# Altium PCB Mother_Board_New - 4 Layers - Fixed.PcbDoc (part 2 of 2)
Units mil, origin at the board's own origin, x right, y up, seen from the top; angles counter-clockwise.
Board outline 4940 x 2025 mil, 3 copper layers (Layer 1, Layer 2, Layer 3), stack 76.411 mil thick; 104 components, 89 nets, 362 pads, 31 vias.
Unrouted connection lines stored in the file: 65.
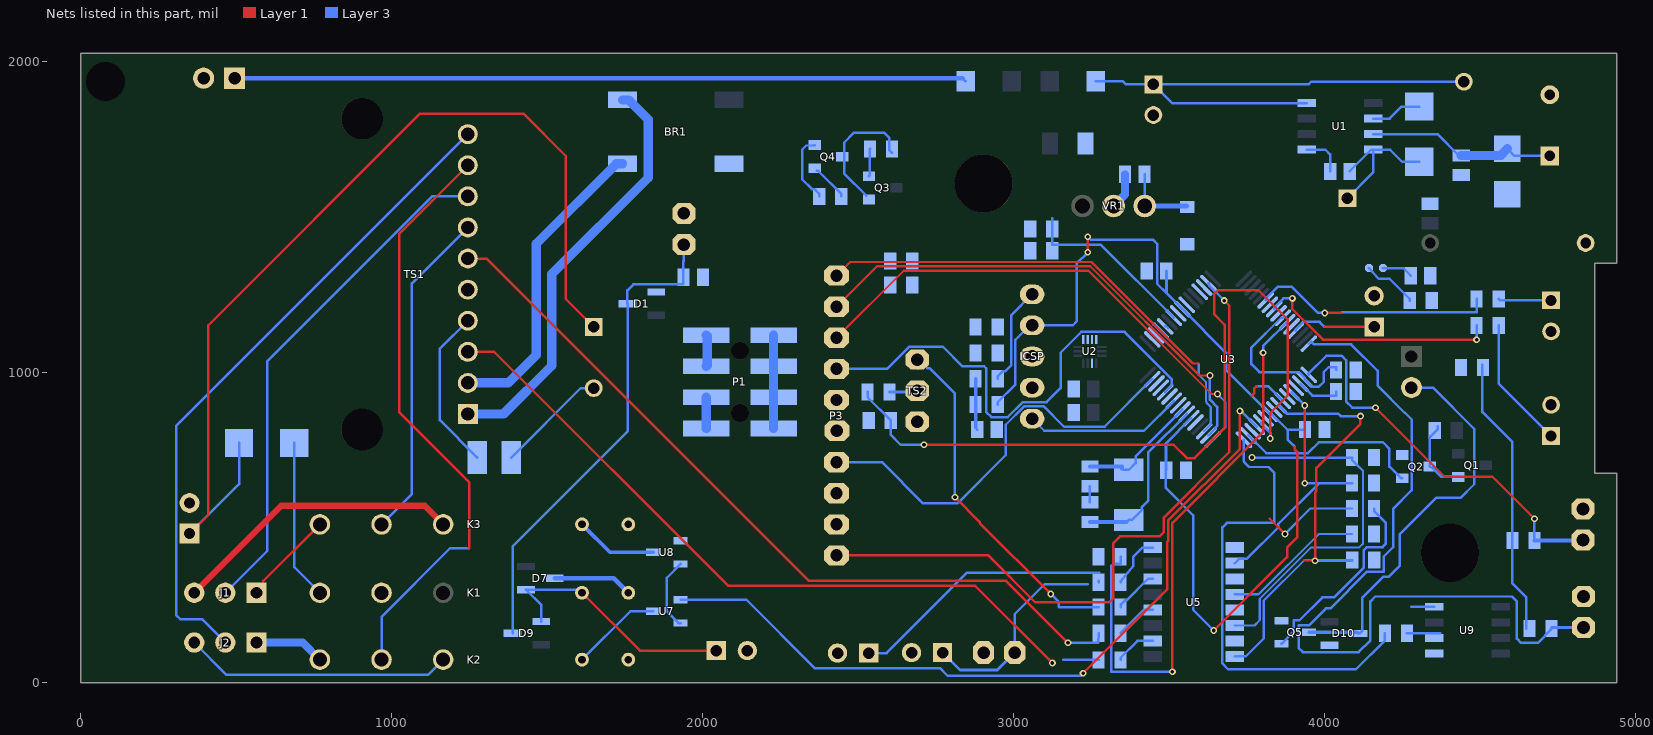
[diagram p2: the nets of this part, all layers, seen from the top]

## Via types
v1: diameter 22, hole 12, Layer 1 to Layer 3, 31 vias

## Nets (pads, with @x,y where several pads share a name; then routed paths per layer and width w, separated by ;. In a path a pad name is that pad's centre, name@x,y a point inside that pad or via, vN(x,y) a via of type N, cw(c..) or ccw(c..) an arc to the next point about the centre after c; other vN are vias at no path point) (continued)
24VC: C3.1 C4.1 D7.3 K1.4 K2.4 K3.4 L1.2 R7.2 TVS1.1 U1.7 | length 871.5
  Layer 3 w8: U1.7@4156.77,1765 4363.62,1765 4432.13,1696.5 C3.1@4440,1696.5 ; TVS1.1@4588.45,1718.18 4611.63,1695 C4.1@4725,1695
  Layer 3 w15: D7.3@1524.26,337 1714.06,337 K1.4@1761.06,290
  Layer 3 w30: C3.1@4440,1696.5 4566.77,1696.5 TVS1.1@4588.45,1718.18
AC: BR1.2 TS1.1 | length 1363.3
  Layer 3 w30: TS1.1@1245,865 1360,865 1515,1020 1515,1315 1825,1625 1825,1812.17 1762.17,1875 BR1.2@1742.48,1875
"Battery Status": R2.1 R3.2 U3.27
BYPASS: R31.1 U3.24 U5.16 | length 1537.8
  Layer 1 w8: 3935,395 v1(3970,393) 3970,612.5 3974.5,617 3974.5,691.5 4116,833 v1(4116,858)
  Layer 3 w7: U5.16@3711.89,85 3712.71,85.82 3747.82,85.82 3805,143 3805,265 3935,395 R31.1@4089.57,395
  Layer 3 w8: U3.24@3852.53,893.4 3879.37,866.56 4044.18,866.56 4052.74,858 v1(4116,858) ; v1(3970,393) 4089.57,393 R31.1@4089.57,395
BYPASS_IN: R24.2 TS1.3 | length 2408.2
  Layer 1 w8: TS1.3@1245,1065 1330,1065 2083,312 2877,312 v1(3125,64)
  Layer 3 w8: 3160,74 R24.2@3273.57,74
CS: U2.4 U3.53 | length 13.9
  Layer 3 w7: U3.53@3487.84,1146.74 3489.98,1148.88 3496.78,1142.09 U3.53@3496.78,1140.79
DPS: R23.2 U3.23 U5.14 | length 1316.3
  Layer 1 w8: 3767,924 3774.91,931.91 3774.91,947.91 3782,955
  Layer 3 w7: U5.14@3711.89,185 3775,185 3792,202 3792,270.38 3957.62,436 4112,436 4124.45,448.45 4124.45,681.55 4105.06,700.94 4105,700.94 4088.82,717.13 R23.2@4088.82,725
  Layer 3 w8: v1(3767,725) R23.2@4088.82,725 ; 3782,955 3818.77,955 U3.23@3866.45,907.32
DPS_IN: R19.2 TS1.6 | length 2570.6
  Layer 1 w8: TS1.6@1245,1365 1305,1365 2342,328 2976,328 v1(3175,129)
  Layer 3 w8: v1(3175,129) 3272.57,129 R19.2@3273.57,160
EDT: CONN2.1 R27.1 U3.11 | length 2720.1
  Layer 1 w8: v1(3511,36) 3511,515 3803,807 v1(3803,1062)
  Layer 3 w8: CONN2.1@2534,96 2592,96 2850.67,354.67 3276.54,354.67 ; R27.1@3344.43,406 3344.43,383 3321,383 3314,376 3314,37 3315,36 v1(3511,36) ; v1(3803,1062) 3803,1083.29 U3.11@3880.37,1160.66
"Fire Loop": C8.1 D1.3 D9.3 TS3.1 | length 1574.2
  Layer 3 w8: D9.3@1388.74,160 1389,160 1389,439 1759,809 1759,1220 D1.3@1758.74,1220 1758,1220 1758,1262.5 1777.5,1282 1938.5,1282 C8.1@1938.5,1305 1938.5,1356 1940,1357.5 TS3.1@1940,1410
GND: BR1.4 C2.2 C3.2 C4.2 C5.2 C6.2 C7.2 C8.2 C9.2 C10.2 C11.2 C12.2 C13.2 C14.1 C15.2 C17.2 C19.2 C46.2 C47.2 CONN1.2 CONN2.2 CONN3.2 CONN4.2 CONN5.2 CR4.1 D3.2 D4.2 D10.1 ICSP.3 JP1.2 P1.1 P1.2 P1.3 P1.4 P5.2 Q2.2 Q4.2 Q5.2 R3.1 R8.1 R12.1 R41.2 TS1.4 TS1.5 TS2.1 TS3.2 TS4.2 TS6.2 TVS1.2 U1.6 U2.9 U3.9 U3.20 U3.25 U3.41 U3.56 U5.9 U5.11 U5.13 U5.15 U7.2 U8.2 U9.1 VR1.2 | length 1615.7
  Layer 3 w8: TS1.4@1245,1165 1155,1075 1155,845.36 1274.88,725.47 R41.2@1274.88,725 ; U7.2@1929.29,192.6 1922.4,192.6 1885,230 1885,338.31 U8.2@1929.29,382.6 ; Q4.2@2360.56,1729.96 2359.15,1728.56 2333.56,1728.56 2320,1715 2320,1620.16 2351.82,1588.34 2359.69,1588.34 2375.38,1572.66 R12.1@2375.38,1564.78 ; C9.2@3246,580.79 C10.2@3246,632.8 ; U1.6@4156.77,1815 4210,1815 4248.58,1853.58 CR4.1@4305,1853.58
  Layer 3 w25: VR1.2@3322,1534 3322,1534.75 3358.43,1571.19 C6.2@3358.43,1636.24
  Layer 3 w30: P1.1@2228.3,818.36 P1.2@2228.3,918.36 P1.3@2228.3,1018.36 P1.4@2228.3,1118.36
GRN_LED: R9.2 U3.8 | length 790
  Layer 1 w8: v1(3897,1237) 3897,1202 3995,1104 v1(4489.57,1104)
  Layer 3 w8: U3.8@3838.61,1202.41 3838.61,1207.75 3867.85,1237 v1(3897,1237) ; v1(4489.57,1104) R9.2@4489.57,1150
IKC: R30.2 U3.21 U5.10 | length 846.6
  Layer 1 w8: v1(3937,642) v1(3937,892.45)
  Layer 3 w8: U5.10@3711.89,385 3725.61,398.72 3749.72,398.72 3851.5,500.5 3851.5,511.5 3982,642 ; U3.21@3894.29,935.16 v1(3937,892.45) ; v1(3937,642) 3982,642 ; R30.2@4088.82,642.87 4088.82,642 3982,642
JMP: JMP1.1 R18.1 U3.12 | length 178.7
  Layer 3 w8: JMP1.1@4143.24,1334.26 4174.26,1300 4210,1300 4274.57,1235.43 R18.1@4274.57,1230
JMP1: C17.1 JMP1.2 | length 100.1
  Layer 3 w8: JMP1.2@4188.24,1334.26 4253.64,1334.26 4277.8,1310.1 C17.1@4277.8,1309.57
LATCH: R29.2 R32.2 U3.28 | length 2510.1
  Layer 1 w8: v1(2712,766) 3515,766 3558,723 3582.5,723 3679,819.5 3679,1152 3645,1186 3645,1250.5 3657.5,1263 3788,1263 3882,1169 3882,925 3826,869 v1(3826,786)
  Layer 3 w8: R32.2@2530.57,936 2530.57,918.87 R29.2@2605.43,844 2605.43,797.57 2637,766 v1(2712,766) ; U3.28@3796.85,837.72 3796.85,832.38 3826,803.23 v1(3826,786)
Latch_In: R32.1 TS2.2 | length 90.2
  Layer 3 w10: R32.1@2601.43,936 2686,936 TS2.2@2690,940
M/CS1: P3.7 U3.44 | length 1577.7
  Layer 3 w8: P3.7@2430.75,1010 2593.52,1010 2665.02,1081.5 2772.5,1081.5 2836,1018 2906,1018 2912,1012 2912,872.06 2929.06,855 2981.47,855 3029.97,903.5 3106.5,903.5 3151.28,948.28 3151.28,1062.13 3217.91,1128.76 3357.07,1128.76 3509.7,976.13 3509.7,958.06 3487.84,936.19 U3.44@3487.84,935.16
M/RES: P3.6 U3.45
MA0: P3.8 U3.33 | length 1653.1
  Layer 1 w7: P3.8@2430.75,1110 2646.75,1326 3241,1326 3638,929 v1(3656,929)
  Layer 3 w7: U3.33@3640.95,782.05 3681,822.09 3681,904 v1(3656,929)
MAGNET_EN: R17.1 U3.32 | length 1544.9
  Layer 3 w8: U3.32@3741.17,782.05 3741.17,712.5 3742.8,710.87 3742.8,709.2 3757.5,694.5 3820,694.5 3838,676.5 3838,515.5 3837,514.5 3686.5,514.5 3672,500 3672,62.5 3690.5,44 4101.57,44 4194.57,137 R17.1@4194.57,160
MB_1: P3.3 U3.61
MB_2: P3.2 U3.62
MB_3: P3.1 U3.63 | length 2230.2
  Layer 1 w8: P3.1@2430.75,410 2919,410 3070,259 3307.5,259 3321,272.5 3321,450 3342,471 3470,471 3483,484 3483,531.13 3694,742.13 3694,1213.62 v1(3678,1229.62)
  Layer 3 w8: U3.63@3627.03,1285.93 3629.02,1285.93 3629.02,1278.6 v1(3678,1229.62)
MBK_Voltage_Control: P3.4 U3.47 | length 1347.9
  Layer 3 w8: P3.4@2430.75,710 2577.02,710 2709.58,577.44 2819.84,577.44 2975.18,732.78 2975.18,830.33 3035.35,890.5 3096.5,890.5 3163,824 3293.16,824 U3.47@3446.08,976.92
MCLR: ICSP.1 R11.2 U3.7 | length 322.4
  Layer 3 w8: R11.2@2949.03,978.17 2949.03,986.04 2964.71,1001.73 2972.59,1001.73 2992,1021.14 2992,1182 ICSP.1@3060,1250
MLCD_Voltage_Control: P3.5 U3.46
MSCL: P3.9 U3.34 | length 1614.6
  Layer 1 w7: P3.9@2430.75,1210 2560.75,1340 3247,1340 3598,989 v1(3632,989)
  Layer 3 w8: U3.34@3627.03,795.97 3648.64,817.57 3648.64,820.27 3655,826.63 3655,888 3632,911 v1(3632,989)
MSI: P3.10 U3.35 | length 1559.7
  Layer 1 w7: P3.10@2430.75,1310 2474.75,1354 3251,1354 3577.5,1027.5 3593.5,1027.5
  Layer 3 w7: 3593.5,1027.5 3596,1025 3596,991 3619.5,967.5 3619.5,905.82 3621,904.32 3621,901 3634.48,887.52 3634.48,831.25 U3.35@3613.11,809.89
NetC1_1: C1.1 CR4.2 L2.1 U1.8 | length 459.6
  Layer 3 w8: L2.1@4074,1559 4156.77,1641.77 U1.8@4156.77,1715 ; C1.1@4081.5,1645 4081.5,1646.38 4150.12,1715 U1.8@4156.77,1715 ; CR4.2@4305,1676.42 4249.58,1676.42 4211,1715 U1.8@4156.77,1715
NetC1_2: C1.2 U1.1 | length 136.5
  Layer 3 w8: U1.1@3943.23,1715 4003.5,1715 4018.5,1700 C1.2@4018.5,1645
NetC5_1: C5.1 CR1.1 L2.2 U1.4 | length 1710.7
  Layer 3 w8: CR1.1@3264.02,1935 3352,1935 3362,1925 C5.1@3450,1925 ; U1.4@3943.23,1865 3510,1865 C5.1@3450,1925 ; L2.2@4448.8,1933.8 3957.8,1933.8 3949,1925 C5.1@3450,1925
NetC9_1: C9.1 U3.39 Y1.1 | length 552.3
  Layer 3 w8: Y1.1@3364.5,517.8 Y1.1@3371,524.29 3381.39,524.29 3412.82,555.73 3412.82,566.12 3434,587.29 3434,742.13 U3.39@3557.44,865.56
  Layer 3 w12: C9.1@3246,517.8 Y1.1@3364.5,517.8
NetC10_1: C10.1 U3.40 Y1.2 | length 397.9
  Layer 3 w8: Y1.2@3349.01,689.8 3353.11,685.71 Y1.2@3371,685.71 3392.49,707.2 3392.49,728.45 U3.40@3543.52,879.48
  Layer 3 w12: C10.1@3246,695.79 3349.01,695.79 Y1.2@3349.01,689.8
NetC11_1: C11.1 U3.10 U3.18 | length 553.4
  Layer 3 w8: U3.10@3866.45,1174.57 3861.11,1174.57 3765,1078.47 3765,1025.5 3790.71,999.79 3918.52,999.79 3936.04,982.26 U3.18@3936.04,976.92 3959.96,953 3982.5,953 3998,968.5 3998,1000 4014,1016 4037.5,1016 C11.1@4037.5,1007
NetC19_1: C19.1 R11.1 R14.1 | length 165.4
  Layer 3 w8: C19.1@2878.16,820.34 C19.1@2883.5,815
  Layer 3 w12: C19.1@2878.16,820.34 R14.1@2878.16,895 R11.1@2878.16,978.17
NetC28_1: C28.1 D8.2 P5.1 | length 3127
  Layer 1 w8: P5.1@350,480.36 410,540.36 410,1150 1090,1830 1425,1830 1560,1695 1560,1235 C28.1@1650,1145
  Layer 3 w8: P5.1@350,480.36 509.42,639.78 D8.2@509.42,772
NetC28_2: C28.2 R41.1 | length 357.3
  Layer 3 w8: R41.1@1385.12,725 1608.27,948.15 C28.2@1650,948.15
NetCONN1_1: CONN1.1 CR2.1 R2.2 | length 2355.1
  Layer 3 w8: CR2.1@2835.98,1945 CR2.1@2845.98,1935
  Layer 3 w15: CONN1.1@495,1945 CR2.1@2835.98,1945
NetCONN3_1: CONN3.1 CONN4.1 R21.2 | length 681.6
  Layer 3 w8: CONN3.1@3004,97.57 3004,221.37 3100.57,317.95 3239.37,317.95 ; R21.2@3273.57,324 R21.2@3274.37,327.95
  Layer 3 w10: CONN4.1@2772,97.57 2828,41.57 2948,41.57 CONN3.1@3004,97.57
NetD1_1: D1.1 R1.1 R4.1
NetD3_1: D3.1 R9.1 | length 425.3
  Layer 3 w8: R9.1@4560.43,1150 4560.43,963.07 D3.1@4729.02,794.49
NetD4_1: D4.1 R10.1 | length 170.4
  Layer 3 w8: R10.1@4560.43,1235 4564.92,1230.51 D4.1@4729.02,1230.51
NetD7_1: D7.1 D9.1 JP1.1 K1.5 | length 816
  Layer 1 w8: K1.5@1612.24,290 1798.24,104 JP1.1@2044,104
  Layer 3 w8: D9.1@1481.26,197.4 1481.26,250.08 D7.1@1431.74,299.6 1602.65,299.6 K1.5@1612.24,290
NetD8_1: D8.1 K1.3 | length 516.1
  Layer 3 w8: D8.1@686.58,772 686.58,372.36 K1.3@768.94,290
NetD10_2: D10.3 J3.2 Q5.3 | length 1288.2
  Layer 3 w8: D10.3@4109.26,159 4113.19,159 4121,166.81 4121,273 4188.91,340.91 4205.56,340.91 4242.69,378.04 4242.69,478.49 4359.2,595 4438,595 4482,639 4482,816.82 4348.82,950 J3.2@4280,950
  Layer 3 w10: Q5.3@3950.29,163 4105.26,163 D10.3@4109.26,159
NetJ1_1: J1.1 K3.3 | length 304.5
  Layer 1 w8: J1.1@565,290 587.5,312.5 587.5,328.56 K3.3@768.94,510
NetJ1_3: J1.3 K3.2 | length 941.3
  Layer 1 w20: J1.3@365,290 644.57,569.57 1106.21,569.57 K3.2@1165.79,510
NetJ2_1: J2.1 K2.3 | length 226.7
  Layer 3 w25: J2.1@565,130 713.94,130 K2.3@768.94,75
NetJ2_3: J2.3 K2.2 | length 864.2
  Layer 3 w8: J2.3@365,130 469,26 1116.79,26 K2.2@1165.79,75
NetK2_5: K2.5 U7.3 | length 292.7
  Layer 3 w8: K2.5@1612.24,75 1767.24,230 U7.3@1840.71,230
NetK3_5: K3.5 U8.3 | length 265.7
  Layer 3 w12: K3.5@1612.24,510 1702.24,420 U8.3@1840.71,420
NetQ1_1: Q1.1 Q2.3 R13.1 | length 245
  Layer 3 w8: R13.1@4365,825 4365,817.13 4339.12,791.25 Q2.3@4339.12,696 4343.06,696 4376.46,662.6 Q1.1@4430.54,662.6
NetQ3_1: Q3.1 Q4.3 R6.1 | length 417.7
  Layer 3 w8: Q3.1@2526.52,1567.38 2455.1,1638.8 2455.1,1737.56 2487.54,1770 2583.42,1770 2600.99,1752.43 2600.99,1713.2 R6.1@2609.57,1704.62
NetQ5_1: Q5.1 R20.1 | length 652.1
  Layer 3 w8: Q5.1@3861.71,125.6 3900.97,164.86 3900.97,200.47 3902,201.5 3919.5,201.5 3993.29,275.29 4031.25,275.29 4126,370.05 4126,426 4137,437 4187,437 4198,448 4198,514.56 4159.69,552.87 R20.1@4159.69,560.75
NetR1_2: R1.2 U3.58
NetR7_1: R7.1 R8.2 U3.55 | length 572.9
  Layer 3 w8: 3125.24,1494.6 3125.24,1460 3125.24,1410.24 3125,1410 3280.25,1410 U3.55@3515.68,1174.57
NetR17_2: R17.2 U9.2 | length 106.7
  Layer 3 w8: R17.2@4265.43,160 4372.18,160
NetR19_1: R19.1 U5.4 | length 135.3
  Layer 3 w8: R19.1@3344.43,160 3344.43,161 3418.43,235 U5.4@3448.11,235
NetR21_1: R21.1 U5.8 | length 171
  Layer 3 w8: R21.1@3344.43,324 3345.24,327.95 3385,375.58 3385,405 3415,435 U5.8@3448.11,435
NetR22_1: R22.1 U5.6 | length 145.7
  Layer 3 w8: R22.1@3344.43,244 3345.24,247.61 3345.24,252.68 3358.12,265.56 3363.19,265.56 3432.63,335 U5.6@3448.11,335
NetR24_1: R24.1 U5.2 | length 133
  Layer 3 w8: R24.1@3344.43,74 3344.43,81 3398.43,135 U5.2@3448.11,135
"Offboard_Out.Alarm Relay": U3.29 U7.1 | length 2527.8
  Layer 1 w8: v1(3224,31) 3495,302 3495,454.5 3497,456.5 3497,522 3728,753 v1(3728,874.74)
  Layer 3 w8: U7.1@1929.29,267.4 2140.6,267.4 2360,48 2763,48 2788,23 3216,23 v1(3224,31) ; v1(3728,874.74) 3732,874.74 U3.29@3782.93,823.81
"Offboard_Out.Bypass Relay": U3.30 U8.1
Offboard_Out.Magnet: K1.1 U9.4 | length 74.2
  Layer 3 w8: 4279.06,245 U9.4@4353.23,245
OKC: R25.2 U3.22 U5.12 | length 457.1
  Layer 3 w7: U5.12@3711.89,285 3788,285 3981.62,478.62 R25.2@4088.82,478.62
OKC_In: R22.2 TS2.3 | length 1110.5
  Layer 1 w8: v1(2811.56,597.44) 2891.16,517.84 2891.16,514.84 v1(3120,286)
  Layer 3 w8: TS2.3@2692.22,1012.5 2698.18,1018.45 2716.55,1018.45 2722.5,1012.5 2730,1012.5 2811.56,930.94 v1(2811.56,597.44) ; v1(3120,286) 3146,260 3146,245 3147,244 R22.2@3273.57,244
PadA: R15.2 TS4.1 U3.16 | length 2634.6
  Layer 3 w8: U3.16@3949.96,1091.06 3956.01,1097.1 3958.5,1097.1 3966.6,1089 4086.18,1089 4171,1004.18 4171,957 4172,956 4172,955.2 4258.2,869 4259,869 4281,847 4281,620 4221,560 4221,436.5 4191,406.5 4191,358 4190,357 4136,357 4019,240 4005,240 3950,185 3918,185 3917,184 3917,112.5 3930.5,99 4110,99 4148,137 4148,262.5 4163.5,278 4603.5,278 4619,262.5 4619,142.5 4632.5,129 4686.43,129 4730.43,173 R15.2@4730.43,175
  Layer 3 w10: R15.2@4730.43,175 4730.43,178 TS4.1@4834,178
PadB: R5.2 TS6.1 U3.17 | length 1277.3
  Layer 1 w8: v1(4164,885) 4386,663 4540.43,663 v1(4675.43,528)
  Layer 3 w8: U3.17@3949.96,990.84 3948.65,992.16 3948.65,994.65 4006,1052 4056,1052 4070,1038 4070,905 4090,885 v1(4164,885) ; R5.2@4675.43,458 v1(4675.43,528)
  Layer 3 w12: R5.2@4675.43,458 4830,458 TS6.1@4832,460
PGC: ICSP.5 U3.42 | length 511.7
  Layer 3 w8: ICSP.5@3060,850 3099,811 3419.36,811 U3.42@3515.68,907.32
PGD: ICSP.4 U3.37
PGND: BR1.1 TS1.2 | length 999
  Layer 3 w30: TS1.2@1245,965 1375,965 1465,1055 1465,1412.48 1722.8,1670.28 BR1.1@1742.48,1670.28
PWR_CTL: Q2.1 Q4.1 R12.2 U3.31 | length 733.2
  Layer 3 w8: Q4.1@2366.52,1647.38 2371.52,1647.38 2446.24,1572.66 R12.2@2446.24,1564.78 ; U3.31@3755.09,795.97 3756.12,795.97 3813.09,739 3947,739 3982,774 4188,774 4209.18,752.82 4209.18,696.02 4246.6,658.6 Q2.1@4250.54,658.6
RED_LED: R10.2 U3.6 | length 778.9
  Layer 1 w8: v1(4001,1190) 4054,1190
  Layer 3 w8: U3.6@3810.77,1230.25 3810.77,1235.59 3850.18,1275 3894.5,1275 3979.5,1190 v1(4001,1190) ; 4054,1190 4056,1192 4488.57,1192 4489.57,1193 R10.2@4489.57,1235
Relays.ALARM: J2.2 TS1.10 | length 2129.6
  Layer 3 w8: J2.2@465,130 390,205 320,205 307.5,217.5 307.5,827.5 TS1.10@1245,1765
Relays.ALARMC: K2.1 TS1.9 | length 1926.5
  Layer 1 w8: TS1.9@1245,1665 1025,1445 1025,870 1250,645 1250,435 1248.09,433.09
  Layer 3 w8: K2.1@967.36,75 967.36,212.36 1188.09,433.09 1248.09,433.09
Relays.BYPASS: J1.2 TS1.8 | length 1665.5
  Layer 3 w8: J1.2@465,290 600,425 600,1035 1130,1565 TS1.8@1245,1565
Relays.BYPASSC: K3.1 TS1.7 | length 1070
  Layer 3 w8: K3.1@967.36,510 1065,607.64 1065,1285 TS1.7@1245,1465
SCL: U2.1 U3.50
SDA: U2.2 U3.52
SDO: U2.3 U3.51
SIREN: R20.2 U3.43 | length 319
  Layer 1 w7: 3824,528 v1(3873,479)
  Layer 3 w7: v1(3873,479) 3954.75,560.75 R20.2@4088.82,560.75
TEST: CONN5.1 R26.1 U3.13 | length 273.2
  Layer 1 w8: 4000.64,1145 CONN5.1@4160,1145
  Layer 3 w8: U3.13@3908.21,1132.82 3908.21,1138.16 3931.05,1161 3984.64,1161 4000.64,1145
VDD: C12.1 C13.1 C14.2 C15.1 D2.1 ICSP.2 R14.2 U3.19 U3.26 U3.38 U3.57 | length 3660.4
  Layer 1 w8: v1(3239,1385) v1(3239,1435) ; v1(3644,169) 3880,405 3880,436 3912,468 3912,743 3907.05,747.95 3907.05,748.31 3905.12,750.24 3905.12,759.79
  Layer 3 w8: R14.2@2949.03,895 2949.03,902.88 3006,959.85 3006,1103.87 3052.13,1150 ICSP.2@3060,1150 3190.5,1150 3203,1162.5 3203,1349 v1(3239,1385) ; v1(3239,1435) 3248,1426 3448.5,1426 3462,1412.5 3462,1283.93 3491.5,1254.43 U3.57@3543.52,1202.41 3684.1,1061.83 3684.1,1006.15 U3.26@3824.69,865.56 3827.36,862.89 3830.03,865.56 3880.59,815 ; C15.1@3491.5,684 3491.5,771.79 ; U3.38@3571.36,851.64 3491.5,771.79 ; v1(3644,169) 3578,235 3578,539 3489,628 3489,684 3489,769.29 3491.5,771.79 ; 3905.12,759.79 3900.91,764 3881.47,783.45 3881.47,814.12 3880.59,815 ; U3.19@3922.12,963 3961.27,923.86 3961.78,924.37 4037.5,924.37 C13.1@4037.5,937 ; C14.2@3937.5,815 3880.59,815
  Layer 3 w10: 3491.5,1254.43 C12.1@3491.5,1325
VDD_INT: C6.1 D2.2 P1.5 P1.6 P1.7 P1.8 Q3.2 R4.2 R5.1 R6.2 R15.1 R18.2 R23.1 R25.1 R26.2 R27.2 R29.1 R30.1 R31.2 VR1.3 | length 1441.1
  Layer 3 w8: Q3.2@2534.85,1629.96 2538.4,1633.52 2538.4,1717.26 R6.2@2538.71,1717.56 ; C6.1@3421.42,1636.24 3422,1635.67 VR1.3@3422,1534 ; D2.2@3556.96,1534 3558,1535.04 D2.2@3559,1531.04 ; R26.2@4507.97,1023 4507.97,871.03 4604.57,774.43 R5.1@4604.57,458 4604.57,320 4649.57,275 R15.1@4649.57,175
  Layer 3 w15: VR1.3@3422,1534 D2.2@3556.96,1534
  Layer 3 w30: P1.5@2012.3,818.36 P1.6@2012.3,918.36 ; P1.7@2012.3,1018.36 2015,1021.06 2015,1115.67 P1.8@2012.3,1118.36
pads on no net: D1.2 D7.2 D9.2 D10.2 H1.0 H2.0 K1.2 P1.0 TS1.0 U1.2 U1.3 U1.5 U2.5 U2.6 U2.10 U2.11 U2.12 U2.13 U2.14 U3.1 U3.2 U3.3 U3.4 U3.5 U3.14 U3.15 U3.36 U3.48 U3.49 U3.54 U3.59 U3.60 U3.64 U9.3
copper on no net: | length 45
  Layer 3 w12: 4143.24,1334.26 4188.24,1334.26

## Polygon pours and split planes (outlines as drawn)
GND on Layer 3 "NONET_L03_P006" (solid, remove dead copper, shelved, pour order 6): 4670,17.83 3057.94,11.53 3059.6,220 2859.68,220 2868.91,1470 4275,1470 4275,1330 4670,1330
GND on Layer 3 "NONET_L03_P009" (solid, shelved, pour order 9): 4870,1985 4870,1500 4280,1500 4280,1583.9 3685,1586.2 3685,1985
GND on Layer 1 "NONET_L01_P007" (solid, remove dead copper, shelved, pour order 7): 4940,2025 4940,1460 4355,1460 4104.1,1710.9 2435,1710.9 1740,1710.9 1740,1105 275,1105 275,2025

## Keep-outs
Layer 1:
  circle w5: c2904,1606.3 r115
  circle w5: c4404,418.7 r115
  rectangle: 3214.5,487.06 3430.63,723.78
Layer 3:
  circle w5: c2904,1606.3 r115
  circle w5: c4404,418.7 r115
  rectangle: 3207.73,480 3446,726.57
Keep-Out Layer:
  lines w1: -17.46,-1.34 4922.54,-1.34 ; 0,0 0,1979 0,2025 4940,2025 4940,1350 4870,1350 4870,675 4940,675 4940,0

## Silkscreen, mask and mechanical layers (free items; w line width, h text height)
Top Overlay:
  text "+" at 1993.32,70 h60
Bottom Overlay:
  circle w10: c4143.24,1334.26 r5
  circle w10: c4188.24,1334.26 r5
  circle w39.37: c538,574 r2
  lines w3.94: 4143.24,1334.26 4188.24,1334.26
  text "ICSP PINOUT / 1. MCLR / 2. VDD / 3. GND / 4. PGD / 5. PGC" at 3830,1425 h33
  text "VDD" at 3425,1415 h30
  text "GND" at 2285,1385 h30
  text "VDD / INT" at 2154,1361 h30
  text "1" at 2990,1225 h30
Bottom Designator:
  text "CR6" at 4134.35,1821.99 h25 r180
  text "R7" at 4579.76,1783.99 h25 r180
  text "R6" at 4336,1741.68 h25 r270
  text "R8" at 4598.17,1675.99 h25 r180
  text "C47" at 4338,1651.68 h25 r270
  text "C16" at 4589.76,1587.99 h25 r180
  text "C46" at 4334,1555.68 h25 r270
  text "D2" at 4589.76,1501.99 h25 r180
  text "C14" at 3538.76,1485 h25 r180
  text "C13" at 4001.67,1447.99 h25 r180
  text "C26" at 4535.67,1319.99 h25 r180
  text "C15" at 4137.76,1317.99 h25 r180
  text "Q10" at 4482.24,1178 h25
  text "C12" at 2862.24,1168 h25
  text "R10" at 4530.24,1012 h25
  text "U3" at 3041.67,943.99 h25 r180
  text "C11" at 3701.76,775.99 h25 r180
  text "R9" at 4468.24,722 h25
  text "R4" at 3701.67,689.99 h25 r180
  text "C27" at 3915.67,685.99 h25 r180
  text "Q11" at 4516.07,622 h25
Drill Drawing:
  drawing of 197 lines, arcs and shapes, not listed
  text "Symbol" at 6836.81,8235 h120
  text "Count" at 7665,8235 h120
  text "Hole Size" at 8638.74,8235 h120
  text "Plated" at 10545.51,8235 h120
  text "Hole Type" at 11373.71,8235 h120
  text "Via/Pad" at 12581.78,8235 h120
  text "Pad Shape" at 13549.93,8235 h120
  text "1" at 7665,7985 h100
  text "125.00mil (3.175mm)" at 8638.74,7985 h100
  text "NPTH" at 10545.51,7985 h100
  text "Round" at 11373.71,7985 h100
  text "Pad" at 12581.78,7985 h100
  text "Rounded" at 13549.93,7985 h100
  text "2" at 7665,7735 h100
  text "35.43mil (0.900mm)" at 8638.74,7735 h100
  text "PTH" at 10545.51,7735 h100
  text "Round" at 11373.71,7735 h100
  text "Pad" at 12581.78,7735 h100
  text "(Mixed)" at 13549.93,7735 h100
  text "2" at 7665,7485 h100
  text "40.00mil (1.016mm)" at 8638.74,7485 h100
  text "PTH" at 10545.51,7485 h100
  text "Round" at 11373.71,7485 h100
  text "Pad" at 12581.78,7485 h100
  text "(Mixed)" at 13549.93,7485 h100
  text "2" at 7665,7235 h100
  text "57.00mil (1.448mm)" at 8638.74,7235 h100
  text "NPTH" at 10545.51,7235 h100
  text "Round" at 11373.71,7235 h100
  text "Pad" at 12581.78,7235 h100
  text "Rounded" at 13549.93,7235 h100
  text "2" at 7665,6985 h100
  text "133.86mil (3.400mm)" at 8638.74,6985 h100
  text "NPTH" at 10545.51,6985 h100
  text "Round" at 11373.71,6985 h100
  text "Pad" at 12581.78,6985 h100
  text "Rounded" at 13549.93,6985 h100
  text "2" at 7665,6735 h100
  text "187.00mil (4.750mm)" at 8638.74,6735 h100
  text "NPTH" at 10545.51,6735 h100
  text "Round" at 11373.71,6735 h100
  text "Pad" at 12581.78,6735 h100
  text "Rounded" at 13549.93,6735 h100
  text "B" at 6791.53,6723.02 h111.11
  text "3" at 7665,6485 h100
  text "47.24mil (1.200mm)" at 8638.74,6485 h100
  text "PTH" at 10545.51,6485 h100
  text "Round" at 11373.71,6485 h100
  text "Pad" at 12581.78,6485 h100
  text "Rounded" at 13549.93,6485 h100
  text "4" at 7665,6235 h100
  text "34.00mil (0.864mm)" at 8638.74,6235 h100
  text "PTH" at 10545.51,6235 h100
  text "Round" at 11373.71,6235 h100
  text "Pad" at 12581.78,6235 h100
  text "(Mixed)" at 13549.93,6235 h100
  text "4" at 7665,5985 h100
  text "36.00mil (0.914mm)" at 8638.74,5985 h100
  text "PTH" at 10545.51,5985 h100
  text "Round" at 11373.71,5985 h100
  text "Pad" at 12581.78,5985 h100
  text "(Mixed)" at 13549.93,5985 h100
  text "4" at 7665,5735 h100
  text "42.00mil (1.067mm)" at 8638.74,5735 h100
  text "PTH" at 10545.51,5735 h100
  text "Round" at 11373.71,5735 h100
  text "Pad" at 12581.78,5735 h100
  text "Octagonal" at 13549.93,5735 h100
  text "5" at 7665,5485 h100
  text "40.16mil (1.020mm)" at 8638.74,5485 h100
  text "PTH" at 10545.51,5485 h100
  text "Round" at 11373.71,5485 h100
  text "Pad" at 12581.78,5485 h100
  text "Rounded" at 13549.93,5485 h100
  text "6" at 7665,5235 h100
  text "24.69mil (0.627mm)" at 8638.74,5235 h100
  text "PTH" at 10545.51,5235 h100
  text "Round" at 11373.71,5235 h100
  text "Pad" at 12581.78,5235 h100
  text "Rounded" at 13549.93,5235 h100
  text "6" at 7665,4985 h100
  text "38.00mil (0.965mm)" at 8638.74,4985 h100
  text "PTH" at 10545.51,4985 h100
  text "Round" at 11373.71,4985 h100
  text "Pad" at 12581.78,4985 h100
  text "(Mixed)" at 13549.93,4985 h100
  text "A" at 6791.53,4973.02 h111.11
  text "9" at 7665,4735 h100
  text "45.00mil (1.143mm)" at 8638.74,4735 h100
  text "PTH" at 10545.51,4735 h100
  text "Round" at 11373.71,4735 h100
  text "Pad" at 12581.78,4735 h100
  text "Rounded" at 13549.93,4735 h100
  text "10" at 7665,4485 h100
  text "42.91mil (1.090mm)" at 8638.74,4485 h100
  text "PTH" at 10545.51,4485 h100
  text "Round" at 11373.71,4485 h100
  text "Pad" at 12581.78,4485 h100
  text "(Mixed)" at 13549.93,4485 h100
  text "14" at 7665,4235 h100
  text "37.00mil (0.940mm)" at 8638.74,4235 h100
  text "PTH" at 10545.51,4235 h100
  text "Round" at 11373.71,4235 h100
  text "Pad" at 12581.78,4235 h100
  text "(Mixed)" at 13549.93,4235 h100
  text "19" at 7665,3985 h100
  text "40.00mil (1.016mm)" at 8638.74,3985 h100
  text "PTH" at 10545.51,3985 h100
  text "Round" at 11373.71,3985 h100
  text "Pad" at 12581.78,3985 h100
  text "(Mixed)" at 13549.93,3985 h100
  text "31" at 7665,3735 h100
  text "12.00mil (0.305mm)" at 8638.74,3735 h100
  text "PTH" at 10545.51,3735 h100
  text "Round" at 11373.71,3735 h100
  text "Via" at 12581.78,3735 h100
  text "Rounded" at 13549.93,3735 h100
  text "C" at 6791.53,3723.02 h111.11
  text "126 Total" at 7665,3485 h100
  text "NOTES: / 1. THE BOARD HAS FOUR LAYERS / 2. BOARD THICKNESS TO BE 62 MILS / 3. 1 OZ OUTSIDE COPPER POURS, 0.5 OZ INTERNAL COPPER POURS / 4. PCB SHALL MEET FOLLOWING SPECIFICATIONS / REQUIREMENTS: /     A. BOARD MATERIAL TO BE FR-4 UL94-V0 RATED /     B. MANUFACTURER AS PER IPC-6012 AND INSPECT AS PER IPC-A-600 /     C. PCB IS ROHS COMPLIANT AND MUST SURVIVE LEAD-FREE SOLDER PROCESSING TEMPERATURES /     D. FINISHED BOARD TO BE SOLDER MASK OVER BARE COPPER /     E. WHITE TOP SIDE SILK SCREEN /     F. BOARD FINISH: HASL /     G. SOLDER MASK COLOR TO BE BLUE / 5. REV INFORMATION ON BOARD REFERS TO THE GERBER FILE REV" at 6730,1145 h100
  text "DETEX CORPORATION / PCB:  / PWA:  /  / DANIEL HAHAJ / (830) 629-2900 x4370" at 6724,42 h100

## Dimensions
4940,0 to 4940,675 on Drill Drawing
112,0 to 0,112 on Drill Drawing
4940,675 to 4940,1350 on Drill Drawing
96,2025 to 0,0 on Drill Drawing
0,0 to 4940,0 on Drill Drawing

## Text inside footprints (layer, text, board x,y; h text height)
C4: Top Overlay "+" at 4591.14,1600.51 h60 r90
C5: Top Overlay "+" at 3310,2000 h60 r270
C28: Top Overlay "+" at 1783.86,1239.49 h60 r270
CONN1: Top Overlay "+" at 589.49,1967.72 h48 r180
CONN3: Top Overlay "+" at 3098.49,120.29 h45.28 r180
J3: Top Overlay "+" at 4257.28,1144.49 h45.28 r270
K1: Top Overlay "NC" at 1206.11,393.34 h50 r180; Top Overlay "NO" at 811.12,396.1 h50 r180; Top Overlay "C" at 985.97,392.78 h50 r180
K2: Top Overlay "C" at 985.97,177.78 h50 r180; Top Overlay "NO" at 811.12,181.1 h50 r180; Top Overlay "NC" at 1206.11,178.34 h50 r180
K3: Top Overlay "C" at 985.97,612.78 h50 r180; Top Overlay "NO" at 811.12,616.1 h50 r180; Top Overlay "NC" at 1206.11,613.34 h50 r180
P1: Bottom Overlay "4" at 2200,1195 h40 r270; Bottom Overlay "5" at 2010.86,700.25 h40 r270; Bottom Overlay "1" at 2180.15,710.25 h40 r270; Bottom Overlay "8" at 1990,1195 h40 r270
TS3: Top Overlay "+" at 1962.72,1315.51 h48 r90
TS4: Top Overlay "+" at 4856.72,83.51 h45.28 r90
TS6: Top Overlay "+" at 4854.72,365.51 h45.28 r90